# Altium PCB BC_PCB.PcbDoc
Units mil, origin at the board's own origin, x right, y up, seen from the top; angles counter-clockwise.
Board outline 3220 x 2020 mil, 2 copper layers (Top Layer, Bottom Layer); 14 components, 8 nets, 35 pads, 14 vias.
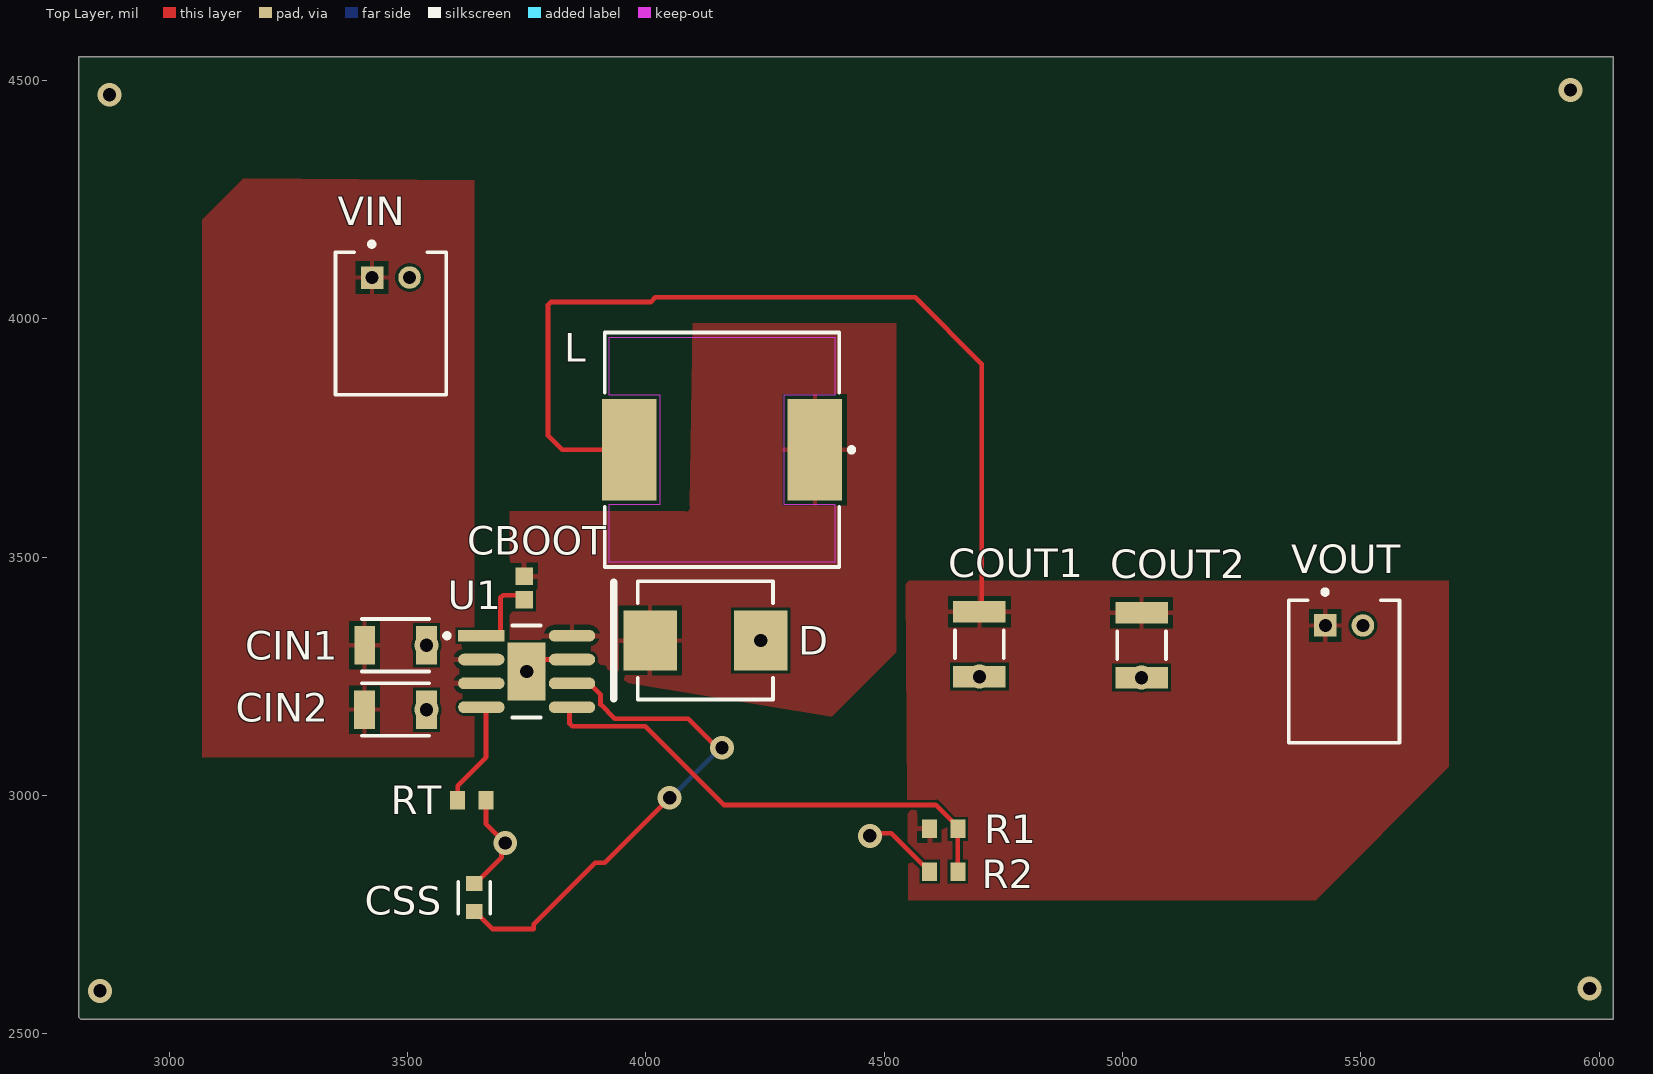
[diagram p0: Top Layer view]
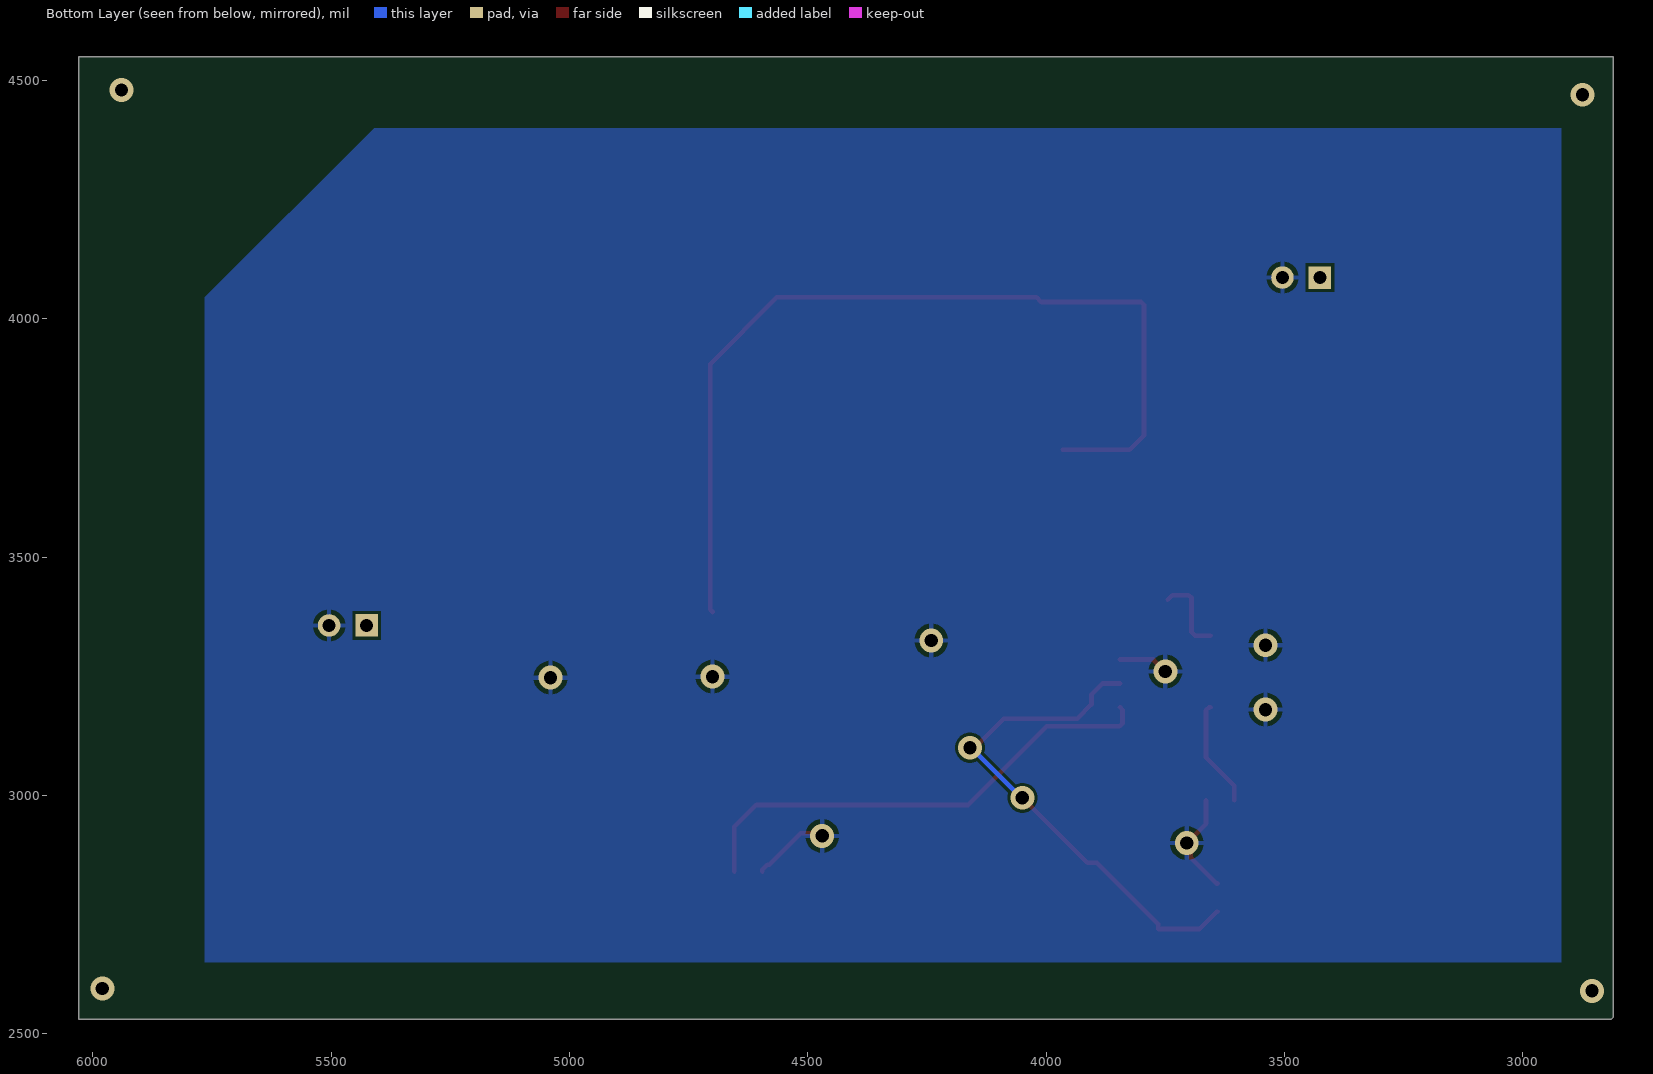
[diagram p1: Bottom Layer view, seen from below]
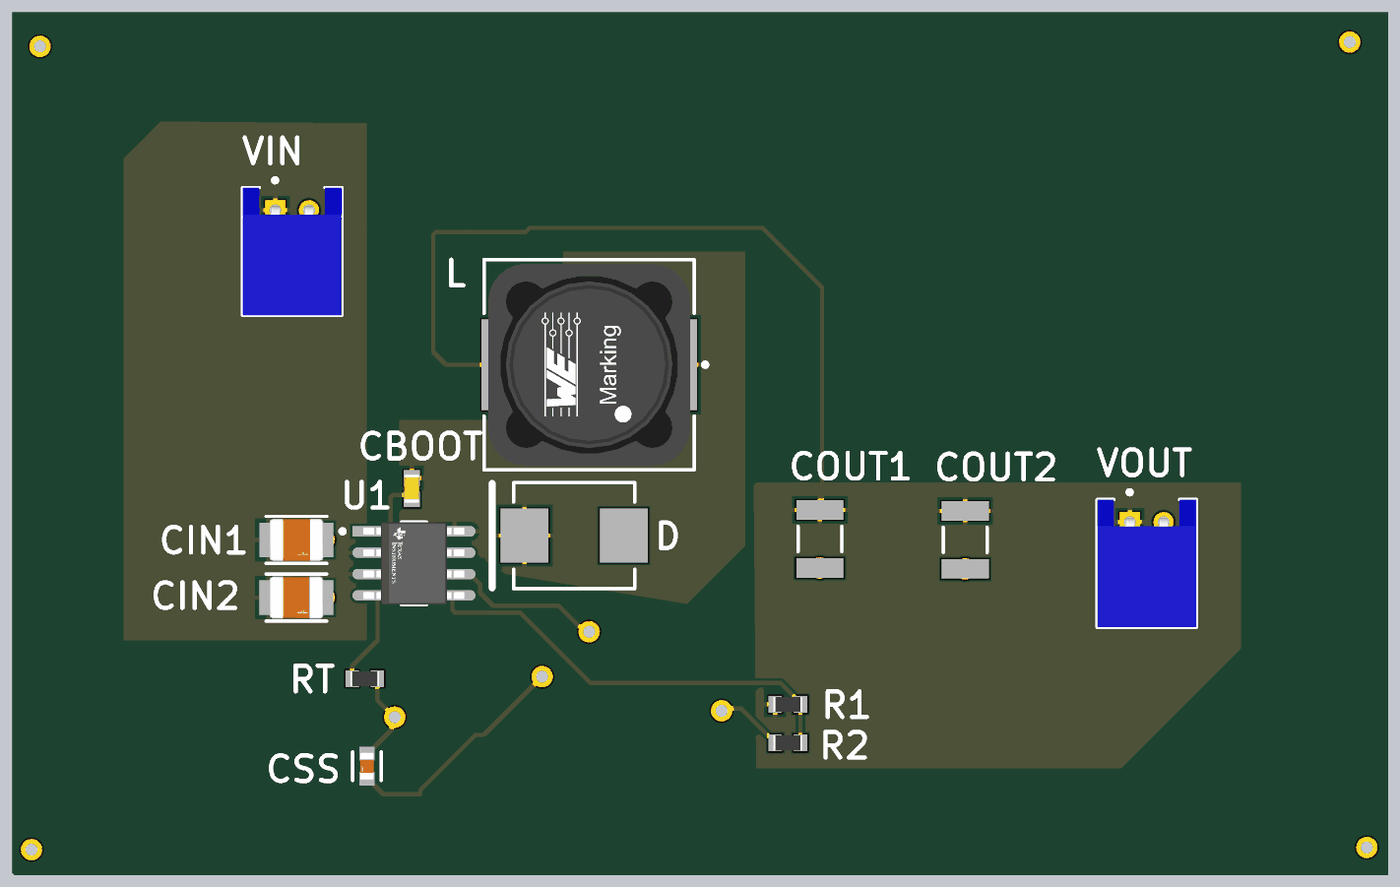
[diagram p2: 3D render of the assembled board from above, using the file's embedded part models]

## Layer stack, top to bottom
Top Solder: solder mask 0.4, Solder Resist, Dk 3.5
Top Layer: signal copper 1.4
Dielectric 1: dielectric 12.6, FR-4, Dk 4.8
Bottom Layer: signal copper 1.4
Bottom Solder: solder mask 0.4, Solder Resist, Dk 3.5

## Board outline
2810,2535 2810,4550 3715,4550 5125,4550 6030,4550 6030,2530 2815,2530

## Design rules (kind name [scope] priority, off if disabled: settings)
Clearance [All] p1: gap=6 ignorepadtopadclearanceinfootprint=FALSE
PolygonConnect [All] p1: connectstyle=Relief reliefconductorwidth=10 reliefentries=4 polygonreliefangle="90 Angle" airgapwidth=10
RoutingVias [All] p1: holewidth=28 width=50 viastyle="Through Hole" minholewidth=28 minwidth=50 maxholewidth=28 maxwidth=50
SolderMaskExpansion [All] p1: expansion=4 istentingtop=FALSE
SupplyNets "Schematic Supply Nets_2" [InNet('VBAT')] p1: voltage=0.000
SupplyNets "Schematic Supply Nets_1" [InNet('+5')] p2: voltage=0.000
SupplyNets "Schematic Supply Nets" [InNet('GND')] p3: voltage=0.000
Width [All] p1: maxlimit=10 minlimit=10 preferedwidth=10
30 further rules are at their usual default settings.

## Components (designator, comment, footprint, x,y, rotation, side; value= is the part's Value field where it differs from the comment)
CBOOT "Capacitor 100 nF +/-10% 50 V 0603" CAPC1608X90X40NL10T20 3745,3435 r90 top value=100nF
CIN1 "GCJ32DC72A475ME01L" FP-GCJ32D-0_4-MFG 3475,3315 r0 top
CIN2 "GCJ32DC72A475ME01L" FP-GCJ32D-0_4-MFG 3474.96,3180 r0 top
COUT1 "GRM32ER61C476ME15L" MURA-1210_H_2.7_M 4700,3317.09 r90 top
COUT2 "GRM32ER61C476ME15L" MURA-1210_H_2.7_M 5040,3315 r90 top
CSS "CC0603KRX7R9BB223" FP-CC0603-DA-MFG 3640,2785.47 r90 top
D "B560C-13-F" DIOD-B5X0C-2_M 4125,3325 r0 top
L "7447709150" WE-PD_1210 4160,3725 r90 top
R1 "Resistor 10k +/-1% 0603 100 mW" RESC1608X55X25ML10T15 4625,2930 r0 top value=56.2k
R2 "Resistor 10k +/-1% 0603 100 mW" RESC1608X55X25ML10T15 4625,2840 r180 top value=10k
RT "Resistor 10k +/-1% 0603 100 mW" RESC1608X55X25ML10T15 3635,2990 r0 top value=49.9k
U1 "LMR16030SDDAR" FP-DDA0008E-IPC_A 3750,3260 r0 top
VIN "S2B-PH-K-S(LF)(SN)" JST-S2B-PH-K-S_V 3465,3990 r0 top
VOUT "S2B-PH-K-S(LF)(SN)" JST-S2B-PH-K-S_V 5465,3260 r0 top

## Footprints (in the part's own frame and the unit in brackets; to place one, negate y for a bottom-side part, rotate by r counter-clockwise, add the part's x,y. Pads: shape width x height; smd on the part's side, far side on the other; paste and mask are expansions set on the pad)
CAPC1608X90X40NL10T20 [mm] "Chip Capacitor, 2-Leads, Body 1.70x0.90mm, IPC Medium Density"
  rect 0.95x0.95 smd: 1(-0.625,0) 2(0.625,0)
  body extent -0.85,-0.45 0.85,0.45, height 0.9
DIOD-B5X0C-2_M [mm] "Molded Diode, 2-Leads, Body 7.11x6.22mm, IPC Low Density"
  rect 2.85x3.2 smd: 1(-2.95,0) 2(2.95,0)
  silkscreen extent -4.87,-3.15 3.6,3.15, body extent -3.56,-3.11 3.55,3.11, height 2.63
FP-CC0603-DA-MFG [mm]
  rect 0.8x0.9 smd paste+0 mask+0: 1(-0.75,0) 2(0.75,0)
  silkscreen extent -0.85,-0.85 0.85,0.85, body extent -1.43,-0.82 1.43,0.82, height 0.25
FP-DDA0008E-IPC_A [mm]
  rect 2.474x0.622 smd paste+0 mask+0: 1(-2.416,1.905)
  rrect100% 2.474x0.622 smd paste+0 mask+0: 2(-2.416,0.635) 3(-2.416,-0.635) 4(-2.416,-1.905) 5(2.416,-1.905) 6(2.416,-0.635) 7(2.416,0.635) 8(2.416,1.905)
  rect 2.025x3.1 smd paste-1000 mask+0: 9(0,0)
  silkscreen extent -4.37,-2.45 0.75,2.45, body extent -4.15,-2.95 4.15,2.95, height 0.25
FP-GCJ32D-0_4-MFG [mm]
  rect 1.1x2.05 smd paste+0 mask+0: 1(-1.65,0) 2(1.65,0)
  silkscreen extent -1.8,-1.4 1.8,1.4, body extent -2.3,-1.5 2.3,1.5, height 0.25
JST-S2B-PH-K-S_V [mm] "THD, 2-Leads, Body 7.6x5.9mm, Pitch 2mm"
  rect 1.2x1.2 hole 0.7: 1(-1,2.45)
  round 1.2 hole 0.7: 2(1,2.45)
  silkscreen extent -2.95,-3.8 2.95,4.35, body extent -2.95,-3.8 2.95,3.8, height 4.8
MURA-1210_H_2.7_M [mm] "Chip Capacitor, 2-Leads, Body 3.5x2.7mm, IPC Low Density"
  rect 1.15x2.8 smd: 1(-1.725,0) 2(1.725,0)
  silkscreen extent -0.75,-1.3 0.75,1.3, body extent -1.75,-1.35 1.75,1.35, height 2.7
RESC1608X55X25ML10T15 [mm] "Chip Resistor, 2-Leads, Body 1.70x0.90mm, IPC Low Density"
  rect 0.8x1 smd: 1(-0.75,0) 2(0.75,0)
  body extent -0.85,-0.45 0.85,0.45, height 0.55
WE-PD_1210 [mm] "SMT Shielded Power Inductor, 2-leads, body 12x12mm"
  rect 5.4x2.9 smd: 1(0,-4.95) 2(0,4.95)
  Top Layer keep-out region: -6,6 -2.9,6 -2.9,3.3 2.9,3.3 2.9,6 6,6 6,-6 2.9,-6 2.9,-3.3 -2.9,-3.3 -2.9,-6 -6,-6
  silkscreen extent -6.25,-7.02 6.25,6.25, body extent -6,-6 6,6, height 9.46

## Part data
CBOOT: library part CMP-001-00017-6, "Chip Capacitor, 100 nF, +/- 10%, 50 V, 0603 (1608 Metric)", Capacitor Type=Ceramic, Case/Package=0603, Max Operating Temperature=125°C, Min Operating Temperature=-55°C, Tolerance=10%, Voltage Rating=50V, Mounting Technology=SM, Pins=2, RoHS Compliant=True
CIN1 CIN2: library part CMP-06035-005025-1, "4.7uF ±20% 100V Ceramic Capacitor X7S 1210 (3225 Metric)"
COUT1 COUT2: library part CMP-2000-05260-1, "CAP, Ceramic, 47 uF, 20%, 16 V, 1210, RoHS, Tape and Reel", Capacitance=47uF, Case Code - in=1210, Case Code - mm=3225, Case Height=2.5mm, Case Length=3.2mm, Dielectric=X5R, Manufacturer=Murata, Maximum Operating Temperature=+85C, Minimum Operating Temperature=-55C, Package / Case=1210(3225metric), Package Description="2-Pin Surface Mount Device, Body 3.2 x 2.5 mm", Tolerance=20%, Voltage Rating DC=16V, Brand=MurataElectronics, Case Width=2.5mm, Datasheet URL=https://datasheet.ciiva.com/3777/2723grm32er61c476me1523-3777296.pdf, Datasheet Version=Aug-14, Factory Pack Quantity=1000, Manufacturer URL=http://www.murata.com/, Package Reference=1210, Packaging=Reel, Product=GeneralTypeMLCCs, Product Category=MultilayerCeramicCapacitorsMLCC-SMD/SMT, RoHS=Details, Series=GRM, Termination Style=SMD/SMT, Type=GeneralPurposeMLCC
CSS: library part CMP-2100-03602-3, "CAP CER 0.022UF 50V X7R 0603", Capacitance=22nF, Case Code (Imperial)=0603, Case Code (Metric)=1608, Dielectric=X7R, Dielectric Material=Ceramic, Insulation Resistance=100GR, Max Operating Temperature=125°C, Min Operating Temperature=-55°C, Package Quantity=1, Tolerance=10%, Voltage=50V, Case/Package=0603, Depth=0.8mm, Halogen Free="Halogen Free", Height=0.8mm, Lead Free="Lead Free", Length=1.6mm, Mount="Surface Mount", Number of Pins=2, Packaging="Tape and Reel", Radiation Hardening=No, REACH SVHC="No SVHC", Resistor Type=Ceramic, RoHS Compliant=Yes, Series=CC, Termination=SMD/SMT, Thickness=0.035inch, Voltage Rating=50V, Voltage Rating (DC)=50V, Width=0.031inch
D: library part CMP-2000-05098-2, "Schottky Barrier Rectifier, 5 A, 60 V, -55 to 125 degC, 2-Pin SMD, RoHS, Tape and Reel", If - Forward Current=5A, Ifsm - Forward Surge Current=100A, Ir - Reverse Current=500uA, Manufacturer=DiodesIncorporated, Maximum Operating Temperature=+125C, Minimum Operating Temperature=-55C, Operating Temperature Range=-55Cto+125C, Package / Case=SMC, Vf - Forward Voltage=0.7V, Vrrm - Repetitive Reverse Voltage=60V, Brand=DiodesIncorporated, Configuration=Single, Datasheet URL=https://datasheet.ciiva.com/27052/1538961-27052355.pdf, Datasheet Version="Rev. 7-2, 06/2007", Factory Pack Quantity=3000, Height=2.5mm, Length=7.11mm, Manufacturer URL=http://www.diodes.com/, Mounting Style=SMD/SMT, Packaging=Reel, Product=SchottkyDiodes, Product Category=SchottkyDiodes&Rectifiers, RoHS=True, Series=B560, Technology=Si, Termination Style=SMD/SMT, Type=SchottkyBarrierRectifier, Unit Weight=0.007408oz, Width=6.22mm
L: library part CMP-0227-00106-3, "Power Choke Shielded Wirewound 15uH 20% 1KHz Ferrite 6.5A 26mOhm DCR T/R", Ambient Temperature Range High=85°C, Ambient Temperature Range Low=-40°C, Case Code (Imperial)=1210, Case Code (Metric)=3225, Case/Package=Nonstandard, Current Rating=6.5A, DC Resistance (DCR)=21mΩ, Inductance=15µH, Inductance Tolerance=20%, Max Operating Temperature=125°C, Saturation Current=8A, Self Resonant Frequency=17MHz, Series Resistance=26mΩ, Test Frequency=1kHz, Composition=Wirewound, Core Material=Ferrite, Depth=12mm, Height=10mm, Height - Seated (Max)=10.0076mm, Lead Free="Lead Free", Lead Pitch=7mm, Length=12mm, Max DC Current=6.5A, Min Operating Temperature=-40°C, Mount="Surface Mount", Number of Pins=2, RMS Current (Irms)=6.5A, RoHS=Compliant, Shielding=Shielded, Termination=SMD/SMT, Tolerance=20%, Weight=9.071847g, Width=12mm
R1 R2 RT: library part CMP-009-00017-5, "Chip Resistor, 10 KOhm, +/- 1%, 01 W, -55 to 155 degC, 0603 (1608 Metric)", Case/Package=0603, Max Operating Temperature=155°C, Min Operating Temperature=-55°C, Power=100mW, Tolerance=1%, Voltage Rating=50V, Mounting Technology=SM, Pins=2, RoHS Compliant=True
U1: library part CMP-04918-000376-1, "IC REG BUCK ADJUSTABLE 3A 8SOPWR", Max Operating Temperature=125°C, Min Operating Temperature=-40°C, Quiescent Current=40uA, Lead Free="Lead Free", Number of Pins=8, RoHS Compliant=Yes
VIN VOUT: library part CMP-002-00030-2, "Male Header, Pitch 2 mm, 1 x 2 Position, Height 4.8 mm, Tail Length 3.4 mm, -25 to 85 degC, RoHS, Bulk", Case/Package=S2B-PH-K-S, Manufacturer="Japan Solderless Terminals", Max Operating Temperature=85°C, Min Operating Temperature=-25°C, Package Description="Male Header, Pitch 2 mm, 1 x 2 Position, Height 4.8 mm, Tail Length 3.4 mm", Connector Type=Header, Datasheet URL=http://www.jst-mfg.com/product/pdf/eng/ePH.pdf, Datasheet Version=Dec-12, Gender=Male, Mounting Technology=SM, Package Reference=S2B-PH-K-S, RoHS Compliant=Unknown

## Via types
v1: diameter 50, hole 28, Top Layer to Bottom Layer, 14 vias

## Nets (pads, with @x,y where several pads share a name; then routed paths per layer and width w, separated by ;. In a path a pad name is that pad's centre, name@x,y a point inside that pad or via, vN(x,y) a via of type N, cw(c..) or ccw(c..) an arc to the next point about the centre after c; other vN are vias at no path point)
+5: COUT1.2 COUT2.2 L.2 R1.1 VOUT.1 | length 1953.3
  Top Layer w10: L.2 3825,3725 3795,3755 3795,4029.14 3800.86,4035 4010,4035 4020,4045 4565,4045 4705,3905 4705,3390 COUT1.2
GND: CIN1.2 CIN2.2 COUT1.1 COUT2.1 CSS.2 D.2 R2.2 RT.2 U1.7 U1.9 VIN.2 VOUT.2 | length 488.7
  Top Layer w10: CSS.2 3641.97,2815 3697.35,2870.38 3697.35,2892.35 v1(3705,2900) 3664.53,2940.47 RT.2 ; v1(3750,3260) 3775,3285 U1.7 ; v1(4470,2915) 4475.47,2920.47 4515,2920.47 4580.79,2854.69 4584.72,2854.69 4595.47,2843.94 R2.2
  other v1: 3539.92,3180 5040,3247.09 4700,3249.17 3539.96,3315 4241.14,3325
NetCBOOT_1: CBOOT.1 U1.1 | length 171.4
  Top Layer w10: U1.1 3687.75,3335 3695,3342.25 3695,3414.14 3700.86,3420 3735.39,3420 CBOOT.1
NetCBOOT_2: CBOOT.2 D.1 L.1 U1.8
NetCSS_1: CSS.1 U1.6 | length 1081.1
  Top Layer w10: CSS.1 3641.97,2755.94 3677.91,2720 3765,2720 3765,2730 3893.67,2858.67 3913.67,2858.67 v1(4050,2995) ; U1.6 3881.58,3235 3905,3211.58 3905,3190.86 3934.86,3161 4089,3161 4150,3100 v1(4160,3100)
  Bottom Layer w10: v1(4050,2995) 4052.5,2995 4157.5,3100 v1(4160,3100)
NetR1_2: R1.2 R2.1 U1.5 | length 1034.6
  Top Layer w10: U1.5 3840,3179.88 3840,3150.86 3845.86,3145 3998.46,3145 4163.46,2980 4608.46,2980 4654.53,2933.94 R1.2 R2.1
NetRT_1: RT.1 U1.4 | length 225.9
  Top Layer w10: RT.1 3605.47,3020.47 3665,3080 3665,3178.3 3658.3,3185 U1.4
VBAT: CIN1.1 CIN2.1 U1.2 U1.3 VIN.1
copper on no net:
  other v1: 2855,2590 5980,2595 2875,4470 5940,4480

## Polygon pours and split planes (outlines as drawn)
NetCBOOT_2 on Top Layer "NETCBOOT_2_L01_P012" (solid, pour order 12): 3715,3269 3901.27,3269 3903.64,3271.36 cw(c3910,3265) 3919,3265 3965,3235 4390,3165 4525,3300 4525,3990 4099,3990 4092.64,3607.36 cw(c4084.6,3604.04) 4081.27,3596 3715,3596
VBAT on Top Layer "VBAT_L01_P013" (solid, pour order 13): 3070,3080 3070,4207.27 3156.97,4294.24 3640,4290 3640,3480 3640,3080
+5 on Top Layer "+5_L01_P016" (solid, pour order 16): 4545,3450 5685,3450 5685,3060 5405,2780 4550.78,2780
GND on Bottom Layer "GND_L02_P000" (solid, pour order 0): 2920,4400 5410,4400 5765,4045 5765,2650 2920,2650

## Silkscreen, mask and mechanical layers (free items; w line width, h text height)
Mechanical 1:
  lines w10: 2810,2535 2810,4550 3111.25,4550 3313.75,4550 3429.06,4550 3599.69,4550 3643.52,4550 3671.17,4550 3715,4550 5125,4550 6030,4550 6030,2530 2815,2530 2810,2535